# Allegro board u-board-dvt-0427.brd
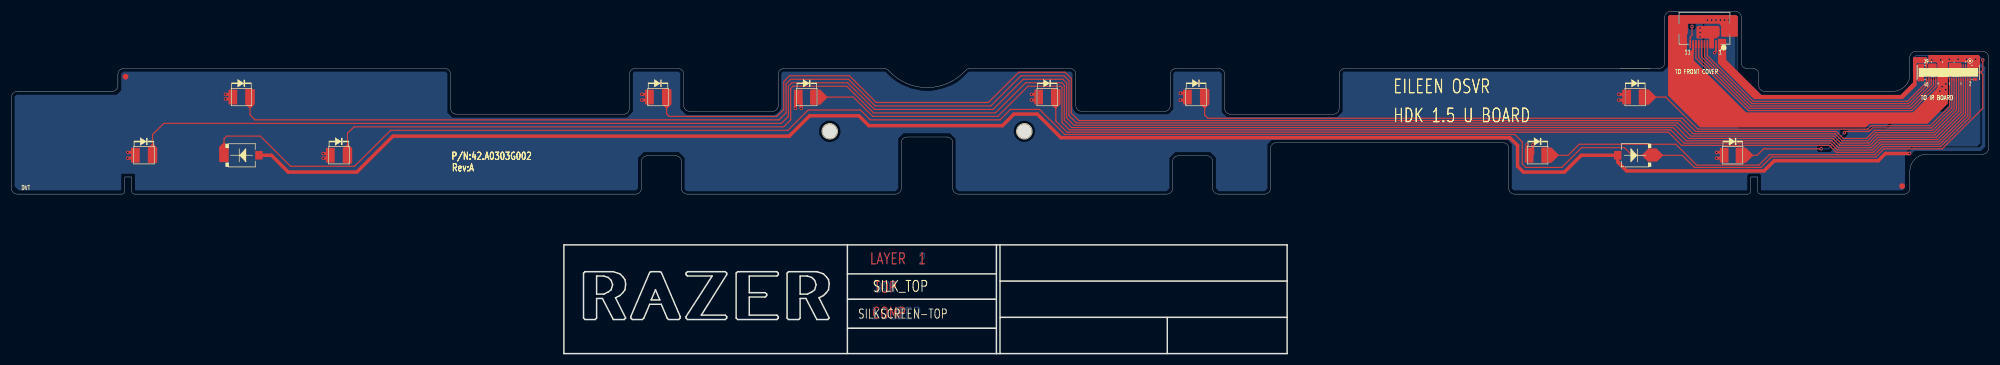
[diagram p0: board, top side]
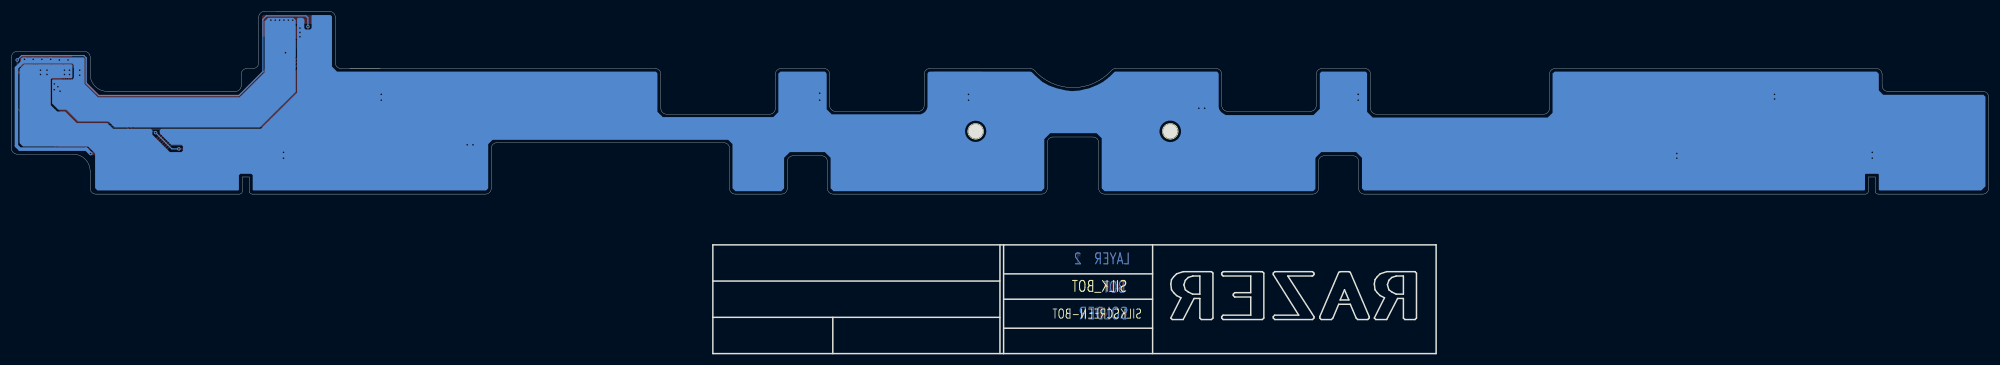
[diagram p1: board, bottom side, seen from below]

Outline 345.43 x 59.94 mm; copper layers: TOP, BOTTOM. Coordinates in mm from the lower left corner of the outline.
Outline path: 166.69,49.61 arc(167.03,49.85) 167.43,49.94 184.97,49.94 arc(185.67,49.65) 185.97,48.94 185.97,43.44 arc(186.26,42.73) 186.97,42.44 201.47,42.44 arc(202.17,42.73) 202.47,43.44 202.47,48.94 arc(202.76,49.65) 203.47,49.94 210.97,49.94 arc(211.67,49.65) 211.97,48.94 211.97,42.94 arc(212.26,42.23) 212.97,41.94 230.97,41.94 arc(231.67,42.23) 231.97,42.94 231.97,48.94 arc(232.26,49.65) 232.97,49.94 287.85,49.94 arc(288.55,50.23) 288.85,50.94 288.84,58.94 arc(289.14,59.65) 289.84,59.94 301.22,59.94 arc(301.93,59.65) 302.22,58.95 302.23,50.94 arc(302.52,50.23) 303.23,49.94 304.29,49.94 arc(304.99,49.65) 305.29,48.94 305.29,46.94 arc(305.58,46.23) 306.29,45.94 328.68,45.94 arc(330.8,46.82) 331.68,48.94 331.68,51.94 arc(331.97,52.65) 332.68,52.94 344.43,52.94 arc(345.13,52.65) 345.43,51.94 345.43,35.94 arc(345.13,35.23) 344.43,34.94 334.68,34.94 arc(332.56,34.06) 331.68,31.94 331.68,28.94 arc(331.39,28.23) 330.68,27.94 305.58,27.94 arc(305.22,28.09) 305.08,28.44 305.08,30.94 303.88,30.94 303.88,28.44 arc(303.73,28.09) 303.38,27.94 262.61,27.94 arc(261.9,28.23) 261.61,28.94 261.61,35.94 arc(261.31,36.65) 260.61,36.94 220.97,36.94 arc(220.26,36.65) 219.97,35.94 219.97,28.94 arc(219.67,28.23) 218.97,27.94 210.88,27.94 arc(210.17,28.23) 209.88,28.94 209.88,33.65 arc(209.58,34.36) 208.88,34.65 203.87,34.65 arc(203.16,34.36) 202.87,33.65 202.87,28.94 arc(202.57,28.23) 201.87,27.94 165.47,27.94 arc(164.76,28.23) 164.47,28.94 164.47,36.94 arc(164.17,37.65) 163.47,37.94 156.47,37.94 arc(155.76,37.65) 155.47,36.94 155.47,28.94 arc(155.17,28.23) 154.47,27.94 118.07,27.94 arc(117.36,28.23) 117.07,28.94 117.07,33.65 arc(116.77,34.36) 116.07,34.65 111.06,34.65 arc(110.35,34.36) 110.06,33.65 110.06,28.94 arc(109.76,28.23) 109.06,27.94 21.5,27.94 arc(21.15,28.09) 21,28.44 21,30.94 19.8,30.94 19.8,28.44 arc(19.65,28.09) 19.3,27.94 1,27.94 arc(0.29,28.23) 0,28.94 0,44.94 arc(0.29,45.65) 1,45.94 17.6,45.94 arc(18.31,46.23) 18.6,46.94 18.6,48.94 arc(18.89,49.65) 19.6,49.94 75.73,49.94 arc(76.43,49.65) 76.73,48.94 76.73,42.94 arc(77.02,42.23) 77.72,41.94 106.97,41.94 arc(107.67,42.23) 107.97,42.94 107.97,48.94 arc(108.26,49.65) 108.97,49.94 116.47,49.94 arc(117.17,49.65) 117.47,48.94 117.47,43.44 arc(117.76,42.73) 118.47,42.44 132.97,42.44 arc(133.67,42.73) 133.97,43.44 133.97,48.94 arc(134.26,49.65) 134.97,49.94 152.5,49.94 arc(152.91,49.85) 153.24,49.6 arc(159.97,46.59) 166.69,49.6 ; 286.35,49.94 281.01,49.94

## Placement (name value [footprint] x y rotation side)
FPC  TP_1mm  [TPC30T]  125.6 45.72 0 top
J101  FPC-11P-0.5MM  [CHYAO_JS-1191PSDR-11]  295.8 54.21 180 top
LED7  SFH 4253  [OSRAM_SFH4253]  283.7 44.94 90 top
LED8  SFH 4253  [OSRAM_SFH4253]  300.73 34.74 90 top
LED9  SFH 4253  [OSRAM_SFH4253]  206.96 44.94 90 top
LED10  SFH 4253  [OSRAM_SFH4253]  112.96 44.94 90 top
LED11  SFH 4253  [OSRAM_SFH4253]  40.18 44.94 90 top
LED12  SFH 4253  [OSRAM_SFH4253]  23.15 34.74 90 top
LED13  SFH 4253  [OSRAM_SFH4253]  57.22 34.74 90 top
LED14  SFH 4253  [OSRAM_SFH4253]  138.96 44.94 90 top
LED15  SFH 4253  [OSRAM_SFH4253]  180.96 44.94 90 top
LED16  SFH 4253  [OSRAM_SFH4253]  266.67 34.74 90 top
LED42  BPW34S-Z  [BPW34S]  283.7 34.74 0 top
LED43  BPW34S-Z  [BPW34S]  40.18 34.74 180 top
M1  HOLEC47040N_NPTH  [HOLEC98D98N]  176.97 38.94 0 top
M2  HOLEC47040N_NPTH  [HOLEC98D98N]  142.97 38.94 0 top
NOREF  -  [unnamed]  330.33 29.34 0 top
NOREF#2  -  [unnamed]  19.94 48.51 0 top
NOREF#3  -  [#2]  96.52 0 0 top
P200  JAE-WP7B-S040VA1  [JAE_WP7B-SXXXVA1]  338.41 49.25 0 top

## Library data of the parts
FPC = T POINT R
J101 = CON2_5
LED7-LED16 = LED55BF/TO_3
LED42 LED43 = LED55BF/TO_1
M1 M2 = Mounting Hole
P200 = CON34_0

## Footprints (pads in the part's own frame, mm; a bottom-side part is the same pattern mirrored in y, then rotated)
BPW34S
  rect 1.295x1.499 smd: A(-3.05,0)
  rect 1.499x2.108 smd: C(3.05,0)
CHYAO_JS-1191PSDR-11
  rect 0.305x1.397 smd: 1(-2.5,0) 2(-2,0) 3(-1.5,0) 4(-1,0) 5(-0.5,0) 6(0,0) 7(0.5,0) 8(1,0) 9(1.5,0) 10(2,0) 11(2.5,0)
  rect 2.108x1.397 smd: S1(3.998,-2.65) S2(-3.998,-2.65)
HOLEC98D98N
  round 2.489 hole 2.489 unplated: (0,0)
JAE_WP7B-SXXXVA1
  rect 0.198x0.617 smd: 1(3.8,1.157) 2(3.8,-1.157) 3(3.4,1.157) 4(3.4,-1.157) 5(3,1.157) 6(3,-1.157) 7(2.6,1.157) 8(2.6,-1.157) 9(2.2,1.157) 10(2.2,-1.157) 11(1.8,1.157) 12(1.8,-1.157) 13(1.4,1.157) 14(1.4,-1.157) 15(1,1.157) 16(1,-1.157) 17(0.6,1.157) 18(0.6,-1.157) 19(0.2,1.157) 20(0.2,-1.157) 21(-0.2,1.157) 22(-0.2,-1.157) 23(-0.6,1.157) 24(-0.6,-1.157) 25(-1,1.157) 26(-1,-1.157) 27(-1.4,1.157) 28(-1.4,-1.157) 29(-1.8,1.157) 30(-1.8,-1.157) 31(-2.2,1.157) 32(-2.2,-1.157) 33(-2.6,1.157) 34(-2.6,-1.157) 35(-3,1.157) 36(-3,-1.157) 37(-3.4,1.157) 38(-3.4,-1.157) 39(-3.8,1.157) 40(-3.8,-1.157)
  rect 0.762x0.508 smd: S1(-4.65,1.2) S2(-4.65,-1.2) S3(4.65,1.2) S4(4.65,-1.2)
OSRAM_SFH4253
  rect 2.591x1.524 smd: A(0,1.5) C(0,-1.5)
TPC30T
  round 0 smd: 1(0,0)
unnamed
  round 1.016 smd: 1(0,0)

## Nets
2.8V_FPC_U: J101.3 J101.4 LED7.A(ANODE) LED8.A(ANODE) LED9.A(ANODE) LED10.A(ANODE) LED11.A(ANODE) LED12.A(ANODE) LED13.A(ANODE) LED14.A(ANODE) LED15.A(ANODE) LED16.A(ANODE) P200.9 P200.11 P200.13 P200.15 P200.17 P200.19 P200.31 P200.33 P200.35 P200.37
3.3V_FPC_U: J101.1 P200.39
DGND_FPC_U: J101.2 J101.10 J101.S1 J101.S2 LED42.A(ANODE) LED43.A(ANODE) P200.1 P200.3 P200.21 P200.22 P200.23 P200.24 P200.25 P200.26 P200.27 P200.28 P200.29 P200.30 P200.S1 P200.S2 P200.S3
DRVCLK_FPC_U: J101.7 P200.36
IR_LED_IN_U: J101.11 LED42.C(CATHODE) LED43.C(CATHODE) P200.5
LATEN_FPC_U: J101.5 P200.40
LED7: LED7.C(CATHODE) P200.20
LED8: LED8.C(CATHODE) P200.18
LED9: LED9.C(CATHODE) P200.16
LED10: LED10.C(CATHODE) P200.14
LED11: LED11.C(CATHODE) P200.12
LED12: LED12.C(CATHODE) P200.10
LED13: LED13.C(CATHODE) P200.8
LED14: LED14.C(CATHODE) P200.6
LED15: LED15.C(CATHODE) P200.4
LED16: LED16.C(CATHODE) P200.2
OUTEN_FPC_U: J101.6 P200.38
SDI_FPC_U: J101.8 P200.34
SDO_FPC_U: J101.9 P200.32

Pads without a net: FPC 1; NOREF 1; NOREF#2 1; P200 7 S4

## Via types
v1: diameter 0.61, hole 0.305, TOP to BOTTOM, 55 vias

## Routing (per net, layer and track width the routed paths; a pad name or vN(x,y) marks a point on that pad's centre or on a via; arc(x,y) is an arc through that point)
2.8V_FPC_U: length 32.8
  TOP w0.508: v1(204.22,44.4) 204.92,44.4 LED9.A 204.79,45.62 v1(204.22,45.62) ; v1(178.21,45.42) 178.99,45.42 LED15.A 178.92,44.4 v1(178.21,44.4) ; v1(37.39,44.6) 38.35,44.6 LED11.A 38.21,45.42 v1(37.39,45.42) ; v1(20.32,34.24) 21.15,34.24 LED12.A 21.14,35.26 v1(20.32,35.26) ; v1(54.46,34.24) 55.21,34.24 LED13.A 55.4,35.05 v1(54.46,35.05) ; v1(136.96,42.98) 136.96,44.43 LED14.A 137.97,44.43 v1(137.97,42.98) ; v1(280.82,44.4) 281.66,44.4 LED7.A 281.72,45.42 v1(280.82,45.42) ; v1(110.13,44.4) 110.92,44.4 LED10.A 110.99,45.42 v1(110.13,45.42) ; v1(297.89,34.24) 298.73,34.24 LED8.A 298.72,35.26 v1(297.89,35.26) ; v1(264.79,36.58) 264.79,35.11 LED16.A 265.5,34.74 265.81,35.05 v1(265.81,36.58)
  vias: v1(295.02,57.02) v1(295.02,56.26) v1(295.02,55.5) v1(335.28,49.66) v1(335.28,48.89) v1(336.17,49.66) v1(336.17,48.89) v1(339.22,49.66) v1(339.22,48.89) v1(340.36,49.66) v1(340.36,48.89)
3.3V_FPC_U: length 2.5
  TOP w0.203: 334.61,50.45 334.61,50.83 334.39,51.05 332.74,51.05 332.61,50.93
DGND_FPC_U: length 339.4
  TOP w0.305: v1(297.56,52.7) 297.8,52.94 J101.2
  TOP w0.356: J101.10 293.8,53 293.62,52.83
  TOP w0.508: 293.62,51.31 293.62,52.83
  TOP w0.61: v1(331.6,35.05) 327.41,35.05 326.14,33.78 307.97,33.78 306.2,32 282.2,32 280.65,33.56 LED42.A 274.26,34.74 271.32,31.8 264.16,31.8 263.14,32.82 263.14,36.47 261.8,37.82 183.36,37.82 179.22,41.96 175.16,41.96 173.13,39.93 149.81,39.93 148.08,41.66 139.45,41.66 135.89,38.1 66.65,38.1 60.35,31.8 48.36,31.8 45.42,34.74 LED43.A
  BOTTOM w0.61: v1(331.6,35.05) 332.36,35.81 343.97,35.81 344.55,36.4 344.55,50.04 343.28,51.31
  vias: v1(296.29,58.42) v1(297.05,58.42) v1(297.81,58.42) v1(298.58,58.42) v1(299.34,58.42) v1(300.1,58.42) v1(333.5,49.66) v1(333.5,48.77) v1(335.53,51.44) v1(336.93,45.97) v1(337.06,51.44) v1(337.31,46.74) v1(337.95,47.24) v1(337.95,46.23) v1(338.58,51.56) v1(340.11,51.56) v1(341.63,51.56) v1(343.15,51.56)
DRVCLK_FPC_U: length 48.4
  TOP w0.203: J101.7 295.3,51.97 303.89,43.38 331.62,43.38 335.41,47.17 P200.36
IR_LED_IN_U: length 416.7
  TOP w0.203: v1(344.42,51.44) 344.42,49.66 344.04,49.28 ; v1(293.62,57.28) 293.62,55.75 293.3,55.43 J101.11 ; 344.04,49.28 341.76,49.28 341.41,49.62 P200.5 ; 344.04,49.28 344.42,48.89 344.42,42.98 337.31,35.86 327.15,35.86 325.73,34.44 307.49,34.44 305.66,32.61 294.03,32.61 291.9,34.74 LED42.C 283.14,34.74 281.81,36.07 274.32,36.07 270.87,32.61 264.57,32.61 263.96,33.22 263.96,37.08 262.66,38.38 184.02,38.38 179.63,42.77 174.55,42.77 172.72,40.94 150.06,40.94 148.34,42.67 139.19,42.67 135.64,39.12 66.24,39.12 59.94,32.82 48.77,32.82 43.48,38.1 37.59,38.1 37.13,37.64 LED43.C
  BOTTOM w0.203: v1(293.62,57.28) 293.62,58.8 294,59.18 300.86,59.18 301.5,58.55 301.5,49.4 305.69,45.21 330.2,45.21 332.36,47.37 332.36,51.82 332.74,52.2 343.66,52.2 v1(344.42,51.44)
LATEN_FPC_U: length 45.6
  TOP w0.203: J101.5 296.3,52.19 304.29,44.2 331.25,44.2 334.61,47.56 P200.40
LED7: length 62.2
  TOP w0.203: LED7.C 289.02,44.94 294.64,39.32 324.31,39.32 324.92,39.93 335.25,39.93 338.61,43.28 P200.20
LED8: length 45.2
  TOP w0.203: v1(320.24,38.71) 320.45,38.91 324.51,38.91 325.12,39.52 335.46,39.52 339.01,43.08 P200.18 ; v1(316.18,35.86) 306.12,35.86 305,34.74 LED8.C
  BOTTOM w0.203: v1(316.18,35.86) 317.4,35.86 v1(320.24,38.71)
LED9: length 143.2
  TOP w0.203: P200.16 339.41,42.87 335.66,39.12 325.53,39.12 324.1,37.69 320.04,37.69 318.82,38.91 294.23,38.91 291.92,41.22 209.02,41.22 208.46,41.78 LED9.C
LED10: length 254.6
  TOP w0.203: LED10.C 114.46,42 114.91,41.55 133.71,41.55 134.92,42.77 134.92,47.65 135.94,48.67 146.41,48.67 151.08,43.99 170.69,43.99 175.97,49.28 184.1,49.28 185.17,48.21 185.17,42.11 186.46,40.82 291.52,40.82 293.83,38.51 318.62,38.51 319.84,37.29 324.31,37.29 325.73,38.71 335.86,38.71 339.81,42.66 P200.14
LED11: length 328.5
  TOP w0.203: P200.12 340.21,42.45 336.07,38.3 325.93,38.3 324.51,36.88 319.63,36.88 318.41,38.1 293.42,38.1 291.11,40.41 186.05,40.41 184.76,41.71 184.76,47.8 183.9,48.67 176.38,48.67 171.09,43.38 150.93,43.38 146.25,48.06 136.14,48.06 135.33,47.24 135.33,42.16 134.11,40.94 42.57,40.94 41.68,41.83 LED11.C
LED12: length 347.2
  TOP w0.203: P200.10 340.61,42.24 336.27,37.9 326.14,37.9 324.71,36.47 319.43,36.47 318.21,37.69 293.01,37.69 290.7,40.01 185.65,40.01 184.35,41.3 184.35,47.4 183.69,48.06 176.78,48.06 171.5,42.77 150.77,42.77 146.1,47.45 136.35,47.45 135.74,46.84 135.74,41.55 134.52,40.34 26.62,40.34 24.65,38.37 LED12.C
LED13: length 313.7
  TOP w0.203: LED13.C 58.72,38.6 59.84,39.73 134.92,39.73 136.14,40.94 136.14,46.43 136.55,46.84 145.95,46.84 150.62,42.16 171.91,42.16 177.19,47.45 183.49,47.45 183.95,46.99 183.95,40.89 185.24,39.6 290.3,39.6 292.61,37.29 318.01,37.29 319.23,36.07 324.92,36.07 326.34,37.49 336.47,37.49 341.01,42.03 P200.8
LED14: length 221.6
  TOP w0.203: LED14.C 147.08,44.94 150.47,41.55 172.31,41.55 177.6,46.84 183.29,46.84 183.54,46.58 183.54,40.49 184.84,39.19 289.89,39.19 292.2,36.88 317.8,36.88 319.02,35.66 325.12,35.66 326.54,37.08 336.68,37.08 341.41,41.82 P200.6
LED15: length 174.9
  TOP w0.203: P200.4 341.81,41.61 336.88,36.68 326.75,36.68 325.32,35.26 318.82,35.26 317.6,36.47 291.79,36.47 289.48,38.79 184.43,38.79 182.46,40.75 LED15.C
LED16: length 86.5
  TOP w0.203: P200.2 342.21,41.4 337.08,36.27 326.95,36.27 325.53,34.85 307.14,34.85 305.31,33.02 294.44,33.02 290.78,36.68 273.91,36.68 271.98,34.74 LED16.C
OUTEN_FPC_U: length 47
  TOP w0.203: P200.38 335.01,47.38 331.42,43.79 304.09,43.79 295.8,52.08 J101.6
SDI_FPC_U: length 49.8
  TOP w0.203: P200.34 335.81,46.96 331.83,42.98 303.68,42.98 294.8,51.86 J101.8
SDO_FPC_U: length 51.2
  TOP w0.203: P200.32 336.21,46.75 332.03,42.57 303.48,42.57 294.3,51.75 J101.9

## Copper pours and planes (outline as drawn; the poured copper is in the pictures)
2.8V_FPC_U on TOP (solid shape): 336.31,50.74 336.31,50.05 336.47,49.89 336.47,48.74 336.3,48.56 335.08,48.56 334.91,48.73 334.91,50.74 335,50.83 336.22,50.83
2.8V_FPC_U on TOP (solid shape): 340.71,50.83 340.71,48.63 340.64,48.56 338.96,48.56 338.89,48.64 338.89,49.71 338.51,50.08 338.51,50.86 338.58,50.93 340.61,50.93
2.8V_FPC_U on TOP (solid shape): 298.45,57.15 298.45,55.75 297.94,55.25 297.56,55.25 297.45,55.13 297.45,53.51 297.41,53.47 296.68,53.47 296.64,53.5 296.64,55.02 296.47,55.19 294.56,55.19 294.39,55.37 294.39,57.15 294.64,57.4 298.2,57.4
2.8V_FPC_U on BOTTOM (solid shape): 292.99,59.18 292.99,57.02 293.24,56.77 294,56.77 294.26,57.02 294.26,58.55 294.51,58.8 295.4,58.8 295.53,58.67 295.53,45.72 301.88,39.37 319.28,39.37 319.53,39.12 319.53,38.61 317.5,36.58 315.72,36.58 315.47,36.32 315.47,35.56 315.72,35.31 317.75,35.31 320.8,38.35 320.8,39.12 321.06,39.37 327.66,39.37 328.68,40.39 334.01,40.39 336.04,42.42 337.44,42.42 338.58,43.56 338.58,48.01 338.33,48.26 334.9,48.26 334.77,48.39 334.77,50.55 334.9,50.67 343.2,50.67 344.02,49.86 344.02,36.88 343.41,36.27 332.03,36.27 330.81,35.05 330.81,28.98 330.4,28.58 305.82,28.58 305.69,28.7 305.69,31.24 305.43,31.5 303.53,31.5 303.28,31.24 303.28,28.7 303.15,28.58 262.51,28.58 262.13,28.96 262.13,36.7 261.37,37.47 220.22,37.47 219.46,36.7 219.46,28.96 218.95,28.45 210.95,28.45 210.44,28.96 210.44,34.29 209.42,35.31 203.33,35.31 202.31,34.29 202.31,28.96 201.8,28.45 165.48,28.45 164.97,28.96 164.97,37.59 163.96,38.61 155.83,38.61 154.94,37.72 154.94,28.96 154.43,28.45 118.08,28.45 117.94,28.49 117.64,28.79 117.6,28.91 117.6,34.29 116.59,35.31 110.49,35.31 109.47,34.29 109.47,28.96 109.09,28.58 21.72,28.58 21.59,28.7 21.59,31.37 21.46,31.5 19.3,31.5 19.18,31.37 19.18,28.7 19.05,28.58 1.27,28.58 0.53,29.31 0.53,39 141.09,39 141.09,38.87 141.09,38.75 141.11,38.63 141.13,38.51 141.17,38.39 141.21,38.27 141.25,38.16 141.31,38.05 141.37,37.94 141.44,37.84 141.51,37.74 141.59,37.65 141.68,37.56 141.77,37.48 141.87,37.41 141.97,37.34 142.08,37.28 142.19,37.22 142.3,37.18 142.42,37.14 142.54,37.11 142.66,37.08 142.78,37.07 142.9,37.06 143.03,37.06 143.15,37.07 143.27,37.08 143.39,37.11 143.51,37.14 143.63,37.18 143.74,37.22 143.85,37.28 143.96,37.34 144.06,37.41 144.16,37.48 144.25,37.56 144.34,37.65 144.42,37.74 144.49,37.84 144.56,37.94 144.62,38.05 144.68,38.16 144.73,38.27 144.77,38.39 144.8,38.51 144.82,38.63 144.84,38.75 144.85,38.87 144.85,39 175.11,39 175.11,38.88 175.12,38.75 175.14,38.63 175.16,38.52 175.19,38.4 175.23,38.28 175.28,38.17 175.33,38.06 175.39,37.96 175.46,37.86 175.53,37.76 175.61,37.67 175.7,37.58 175.79,37.5 175.89,37.43 175.99,37.36 176.09,37.3 176.2,37.25 176.31,37.2 176.43,37.16 176.55,37.13 176.66,37.11 176.78,37.09 176.91,37.08 177.03,37.08 177.15,37.09 177.27,37.11 177.39,37.13 177.5,37.16 177.62,37.2 177.73,37.25 177.84,37.3 177.94,37.36 178.05,37.43 178.14,37.5 178.23,37.58 178.32,37.67 178.4,37.76 178.47,37.86 178.54,37.96 178.6,38.06 178.65,38.17 178.7,38.28 178.74,38.4 178.77,38.52 178.79,38.63 178.81,38.75 178.82,38.88 178.82,39 178.81,39.12 178.79,39.24 178.77,39.36 178.74,39.47 178.7,39.59 178.65,39.7 178.6,39.81 178.54,39.91 178.47,40.02 178.4,40.11 178.32,40.2 178.23,40.29 178.14,40.37 178.05,40.44 177.94,40.51 177.84,40.57 177.73,40.62 177.62,40.67 177.5,40.71 177.39,40.74 177.27,40.76 177.15,40.78 177.03,40.79 176.91,40.79 176.78,40.78 176.66,40.76 176.55,40.74 176.43,40.71 176.31,40.67 176.2,40.62 176.09,40.57 175.99,40.51 175.89,40.44 175.79,40.37 175.7,40.29 175.61,40.2 175.53,40.11 175.46,40.02 175.39,39.91 175.33,39.81 175.28,39.7 175.23,39.59 175.19,39.47 175.16,39.36 175.14,39.24 175.12,39.12 175.11,39 144.85,39 144.84,39.12 144.82,39.24 144.8,39.36 144.77,39.48 144.73,39.6 144.68,39.71 144.62,39.82 144.56,39.93 144.49,40.03 144.42,40.13 144.34,40.22 144.25,40.31 144.16,40.39 144.06,40.46 143.96,40.53 143.85,40.59 143.74,40.65 143.63,40.7 143.51,40.74 143.39,40.77 143.27,40.79 143.15,40.81 143.03,40.82 142.9,40.82 142.78,40.81 142.66,40.79 142.54,40.77 142.42,40.74 142.3,40.7 142.19,40.65 142.08,40.59 141.97,40.53 141.87,40.46 141.77,40.39 141.68,40.31 141.59,40.22 141.51,40.13 141.44,40.03 141.37,39.93 141.31,39.82 141.25,39.71 141.21,39.6 141.17,39.48 141.13,39.36 141.11,39.24 141.09,39.12 141.09,39 0.53,39 0.53,44.98 0.89,45.34 18.41,45.34 19.18,46.1 19.18,49.02 19.56,49.4 75.82,49.4 76.17,49.05 76.17,42.19 77.01,41.35 107.59,41.35 108.58,42.34 108.58,49.15 108.84,49.4 116.53,49.4 116.84,49.1 116.84,42.88 117.93,41.78 133.27,41.78 133.86,42.14 134.14,42.39 134.34,42.67 134.44,42.9 134.52,43.23 134.52,48.92 134.54,49.07 134.59,49.2 134.72,49.33 134.8,49.38 134.87,49.4 152.57,49.4 152.7,49.35 153.54,48.51 154.18,48.01 154.69,47.62 155.57,47.12 157.1,46.48 158.75,46.1 160.15,45.97 161.16,46.1 162.81,46.48 164.21,46.99 165.35,47.62 166.5,48.64 167.13,49.28 167.39,49.4 184.99,49.4 185.09,49.38 185.19,49.33 185.29,49.23 185.37,49.07 185.39,48.87 185.39,43.13 185.52,42.77 185.67,42.52 185.88,42.29 186.05,42.16 186.33,42.01 186.66,41.91 202.11,41.91 203,42.8 203,48.95 203.1,49.2 203.23,49.33 203.35,49.4 211.07,49.4 211.45,49.02 211.45,42.29 212.32,41.43 231.62,41.43 232.56,42.37 232.56,49.1 232.87,49.4 288.54,49.4 289.43,50.29 289.43,59.05 289.69,59.31 292.86,59.31
3.3V_FPC_U on TOP (solid shape): 299.59,54.99 299.59,51.44 305.69,45.34 330.07,45.34 332.23,47.5 332.23,51.82 332.36,51.94 334.52,51.94 334.71,51.75 334.71,50.1 334.64,50.04 334.42,50.04 334.37,50.09 334.37,50.77 334.21,50.93 332.99,50.93 332.87,50.8 332.87,46.99 330.45,44.58 304.42,44.58 298.14,50.85 298.14,55.07 298.2,55.12 299.47,55.12
DGND_FPC_U on TOP (solid shape): 334.14,50.72 334.14,47.78 334.06,47.7 333.04,47.7 332.99,47.75 332.99,50.67 333.12,50.8 334.06,50.8
DGND_FPC_U on TOP (solid shape): 301.62,59.05 301.62,55.63 301.5,55.5 298.83,55.5 298.7,55.63 298.7,57.4 298.32,57.78 292.99,57.78 292.86,57.66 292.86,56.01 292.73,55.88 292.73,53.21 292.86,53.09 293.62,53.09 293.88,52.83 293.88,51.44 303.05,42.27 332.15,42.27 332.18,42.29 332.23,42.29 336.51,46.57 336.51,48.48 336.68,48.64 336.68,49.93 336.51,50.1 336.51,50.79 336.24,51.05 335.03,51.05 334.9,51.18 334.9,52.2 335.03,52.32 343.66,52.32 343.92,52.07 343.92,50.29 343.66,50.04 341.77,50.04 341.71,50.1 341.71,50.97 341.63,51.05 338.45,51.05 338.31,50.91 338.31,50.01 338.66,49.66 338.66,48.77 338.31,48.42 338.31,43.8 334.77,40.26 324.61,40.26 323.98,39.62 302.01,39.62 295.02,39.62 289.43,45.21 289.43,59.05 289.69,59.31 298.45,59.31 298.45,59.31 301.37,59.31
DGND_FPC_U on BOTTOM (solid shape): 301.19,58.22 301.19,49.28 305.56,44.91 330.33,44.91 332.66,47.24 332.66,51.69 332.87,51.89 343.54,51.89 343.79,51.64 343.79,50.93 343.66,50.8 334.77,50.8 334.52,50.55 334.52,48.26 334.77,48.01 338.2,48.01 338.33,47.88 338.33,43.81 337.25,42.74 335.85,42.74 333.76,40.64 328.42,40.64 327.41,39.62 302.01,39.62 295.76,45.87 295.76,58.42 296.14,58.8 300.61,58.8
IR_LED_IN_U on TOP (solid shape): 37.95,36.21 37.95,33.67 37.82,33.54 36.42,33.54 36.3,33.67 36.3,36.21 37.06,36.97 37.19,36.97
IR_LED_IN_U on TOP (solid shape): 288.54,34.8 288.54,34.67 287.53,33.66 285.88,33.66 284.86,34.67 284.86,34.8 286,35.94 287.4,35.94
LED7 on TOP (solid shape): 287.35,44.98 287.35,44.86 286.08,43.59 284.43,43.59 284.3,43.71 284.3,46.13 284.43,46.25 286.08,46.25
LED8 on TOP (solid shape): 304.29,34.8 304.29,34.67 303.02,33.4 301.37,33.4 301.24,33.53 301.24,35.94 301.37,36.07 303.02,36.07
LED9 on TOP (solid shape): 209.3,46.23 209.3,43.69 208.53,42.93 208.41,42.93 207.64,43.69 207.64,46.23 207.77,46.36 209.17,46.36
LED10 on TOP (solid shape): 115.32,46.22 115.32,43.68 114.55,42.91 114.43,42.91 113.66,43.68 113.66,46.22 113.79,46.34 115.19,46.34
LED11 on TOP (solid shape): 42.49,46.22 42.49,43.68 41.73,42.91 41.6,42.91 40.84,43.68 40.84,46.22 40.97,46.34 42.37,46.34
LED12 on TOP (solid shape): 25.48,36.03 25.48,33.49 25.35,33.36 23.95,33.36 23.82,33.49 23.82,36.03 24.59,36.79 24.71,36.79
LED13 on TOP (solid shape): 59.54,35.95 59.54,33.41 59.41,33.29 58.01,33.29 57.89,33.41 57.89,35.95 58.65,36.72 58.78,36.72
LED14 on TOP (solid shape): 142.57,44.98 142.57,44.86 141.3,43.59 139.65,43.59 139.52,43.71 139.52,46.13 139.65,46.25 141.3,46.25
LED15 on TOP (solid shape): 183.26,46.22 183.26,43.68 182.5,42.91 182.37,42.91 181.61,43.68 181.61,46.22 181.74,46.34 183.13,46.34
LED16 on TOP (solid shape): 270.33,34.82 270.33,34.7 269.06,33.43 267.41,33.43 267.28,33.55 267.28,35.97 267.41,36.09 269.06,36.09

## Text on the board
Ref Des/Silkscreen Top: DVT | TO FRONT COVER | TO IR BOARD | P/N:42.A0303G002 | Rev:A | EILEEN OSVR | HDK 1.5 U BOARD
BODY_CENTER: FIGURE | SIZE | 12.0 | 98.0 | DRILL CHART: TOP to BOTTOM | ALL UNITS ARE IN MILS | PLATED | NON-PLATED | QTY | 55 | 2
User.7: 22.00 | 18.00 | 14.50 | 14.00 | 10.00 | 0.20(THICKNESS) | 6.71 | 18.60 | 19.80 | 0.50 | 76.73 | 107.97 | 11.00+/-0.10 | 12.50+/-0.15 | 85.80 | 85.00 | 34.00+/-0.15 | 99.82 | 9.00 | 52.00 | 104.00 | 345.43 | 2.50(HOLE) | 10.09 | 41.64 | 133.46 | 42.27 | 1.20 | 26.60 | 13.75 | 3.00 | 7.00 | 25.00
